# Altium PCB верхняя плата версия 2.PcbDoc (part 1 of 2)
Units mm, origin at the board's own origin, x right, y up, seen from the top; angles counter-clockwise.
Board outline 45 x 53 mm, 4 copper layers (Top Layer 1, Top Layer, Bottom Layer, Bottom Layer 1), stack 0.603 mm thick; 105 components, 130 nets, 774 pads, 328 vias.
Unrouted connection lines stored in the file: 15.
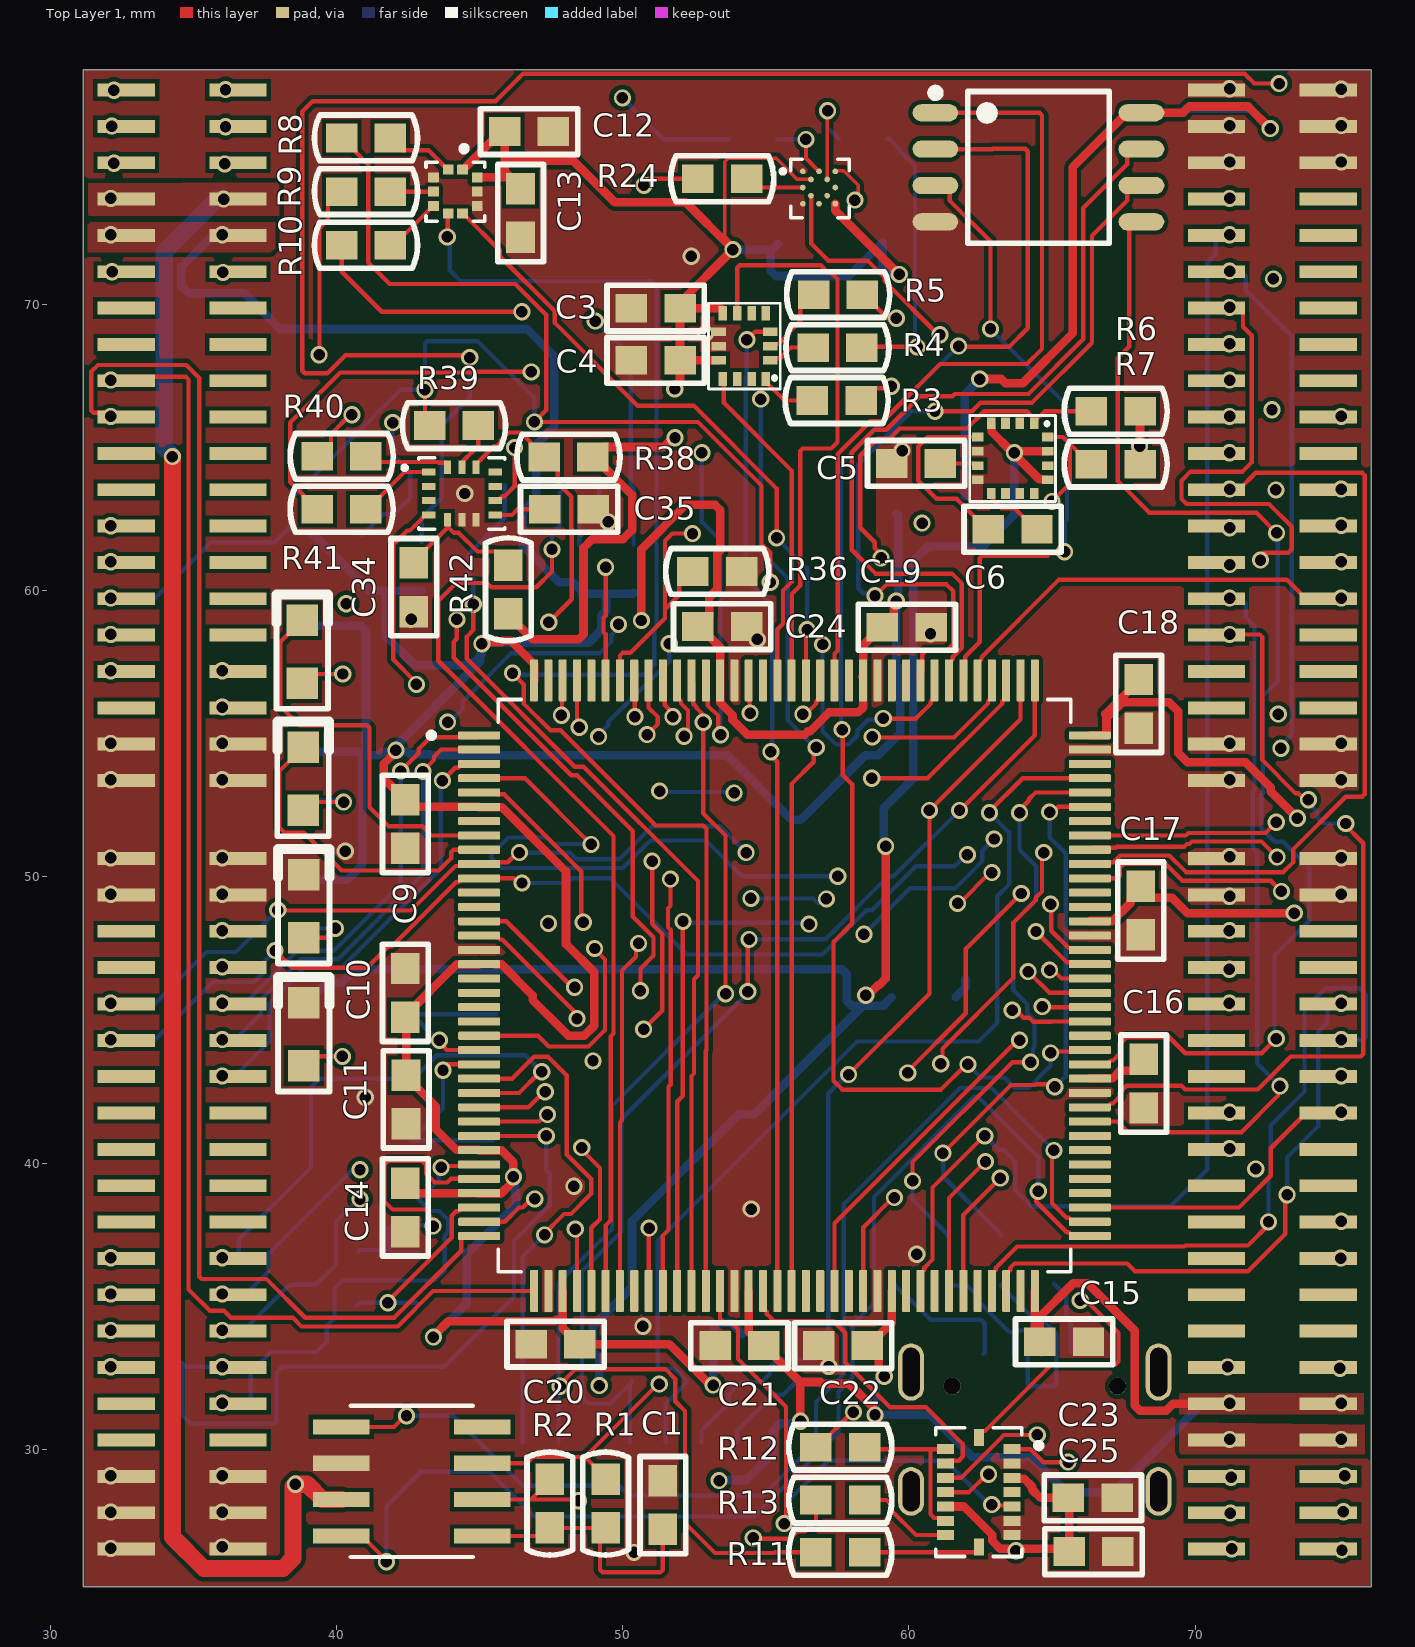
[diagram p0: Top Layer 1 view]
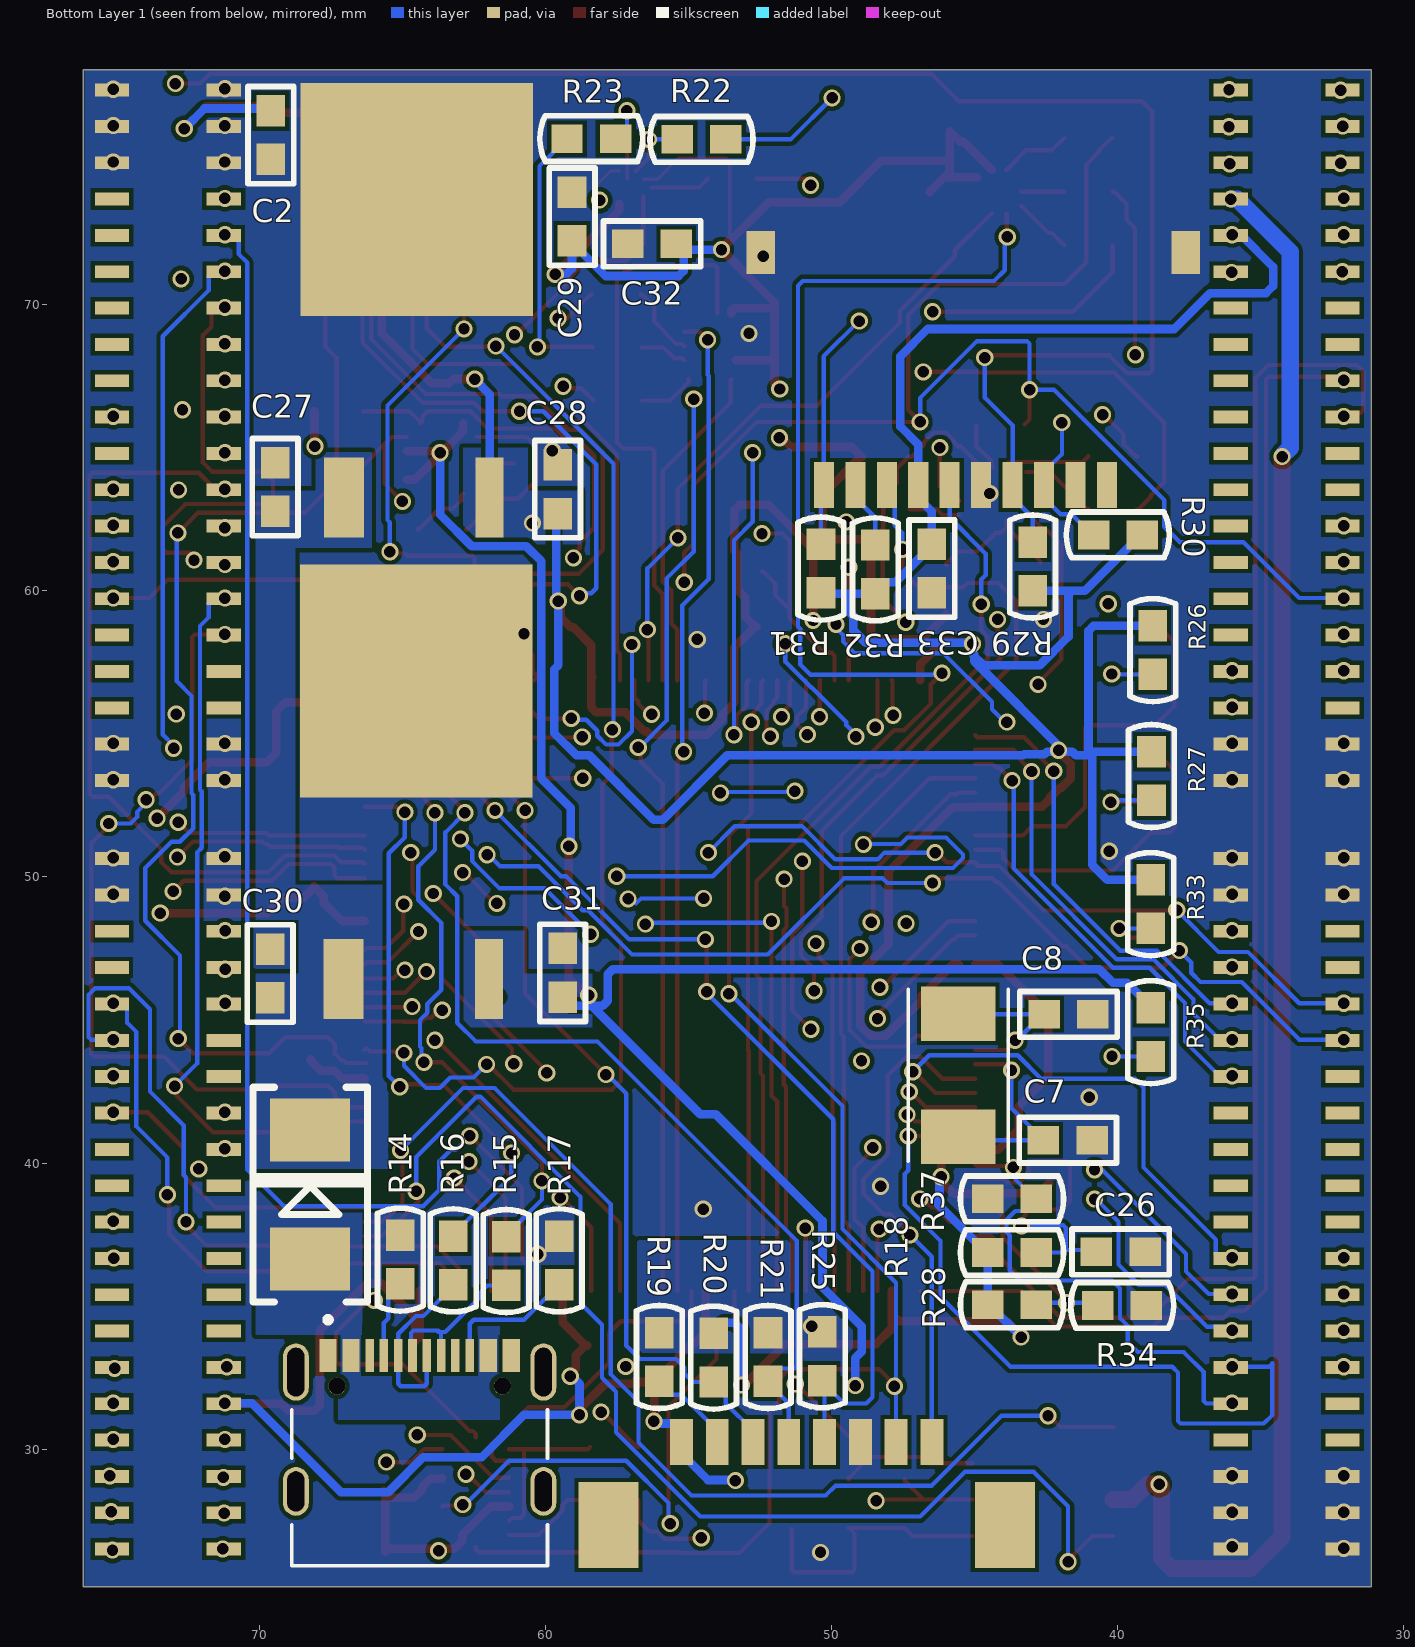
[diagram p1: Bottom Layer 1 view, seen from below]
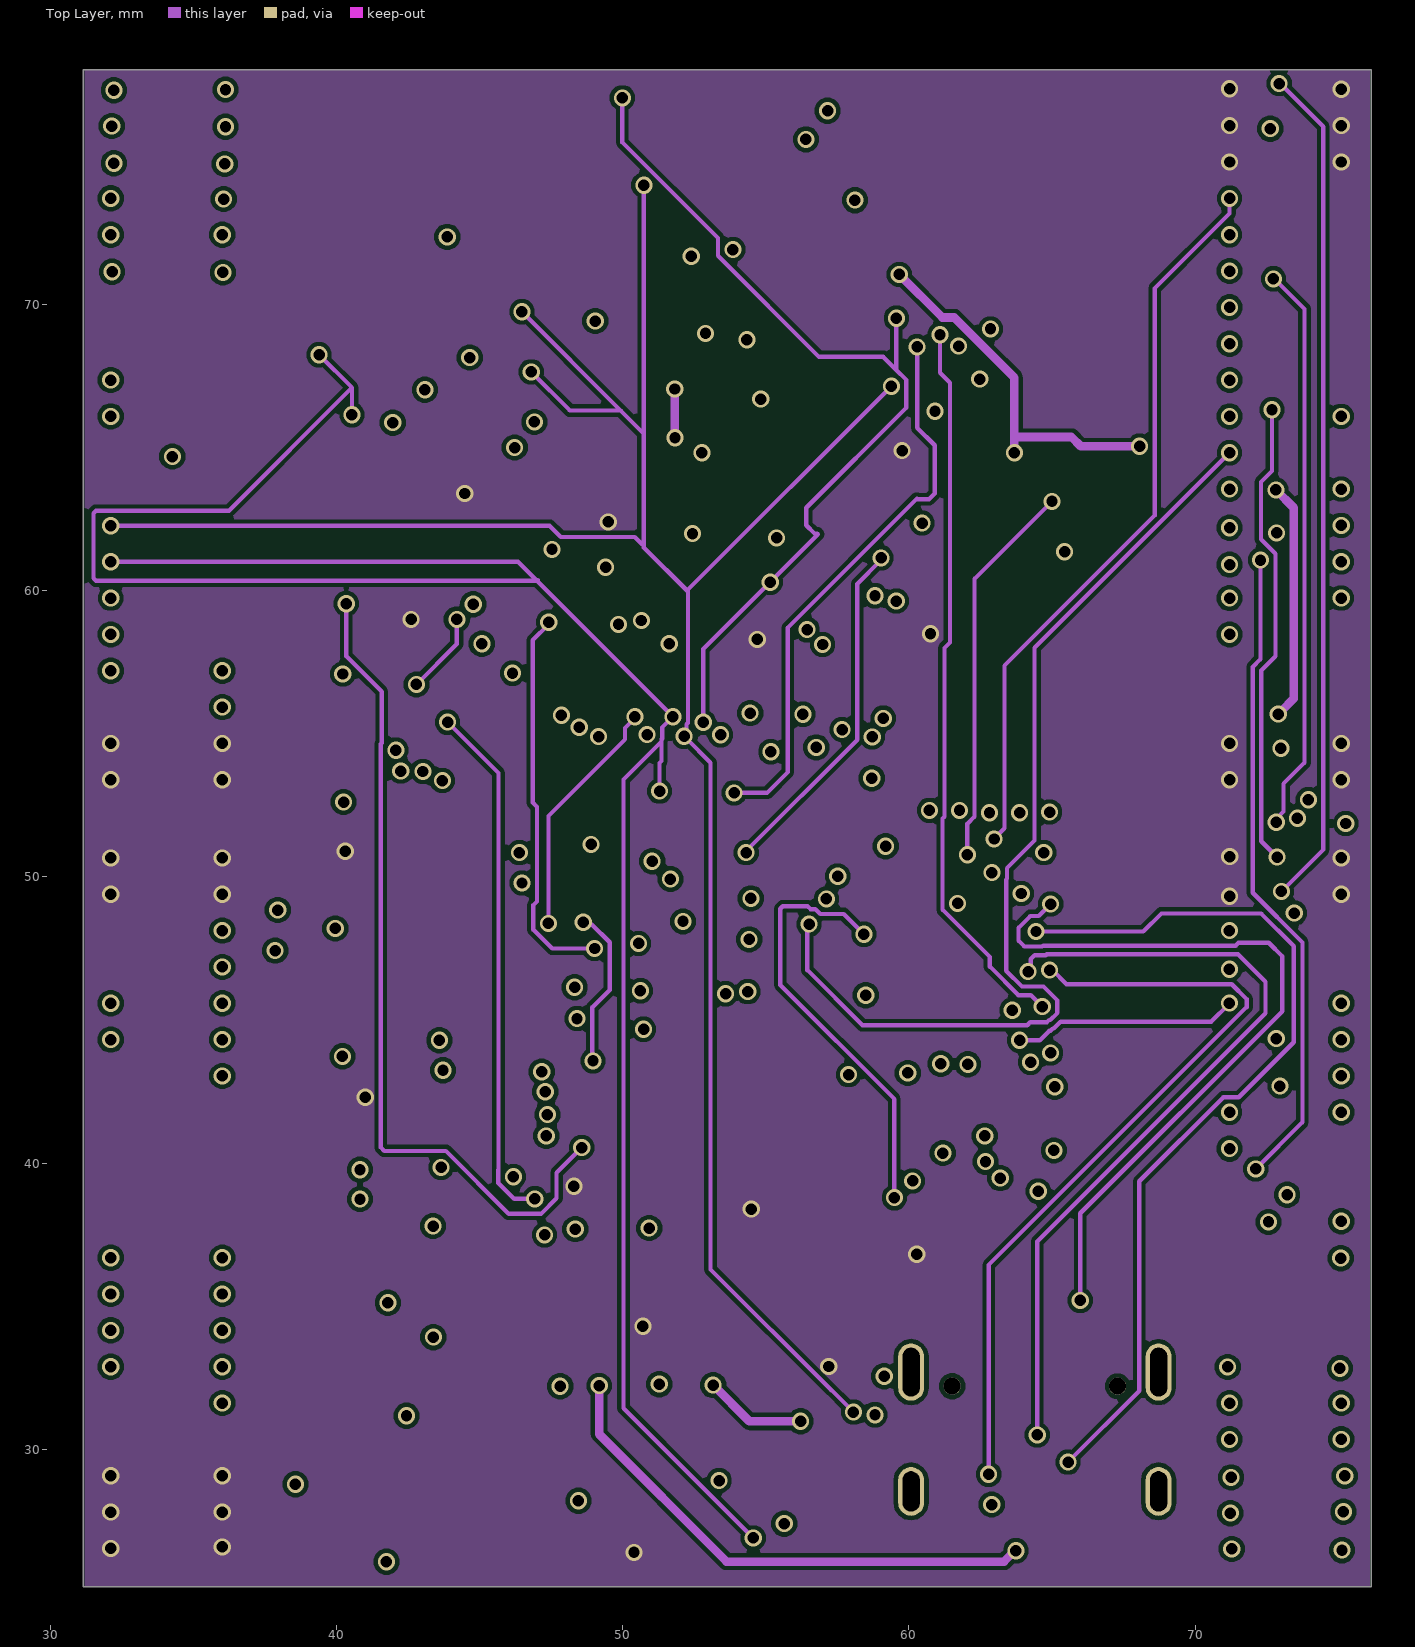
[diagram p2: Top Layer]
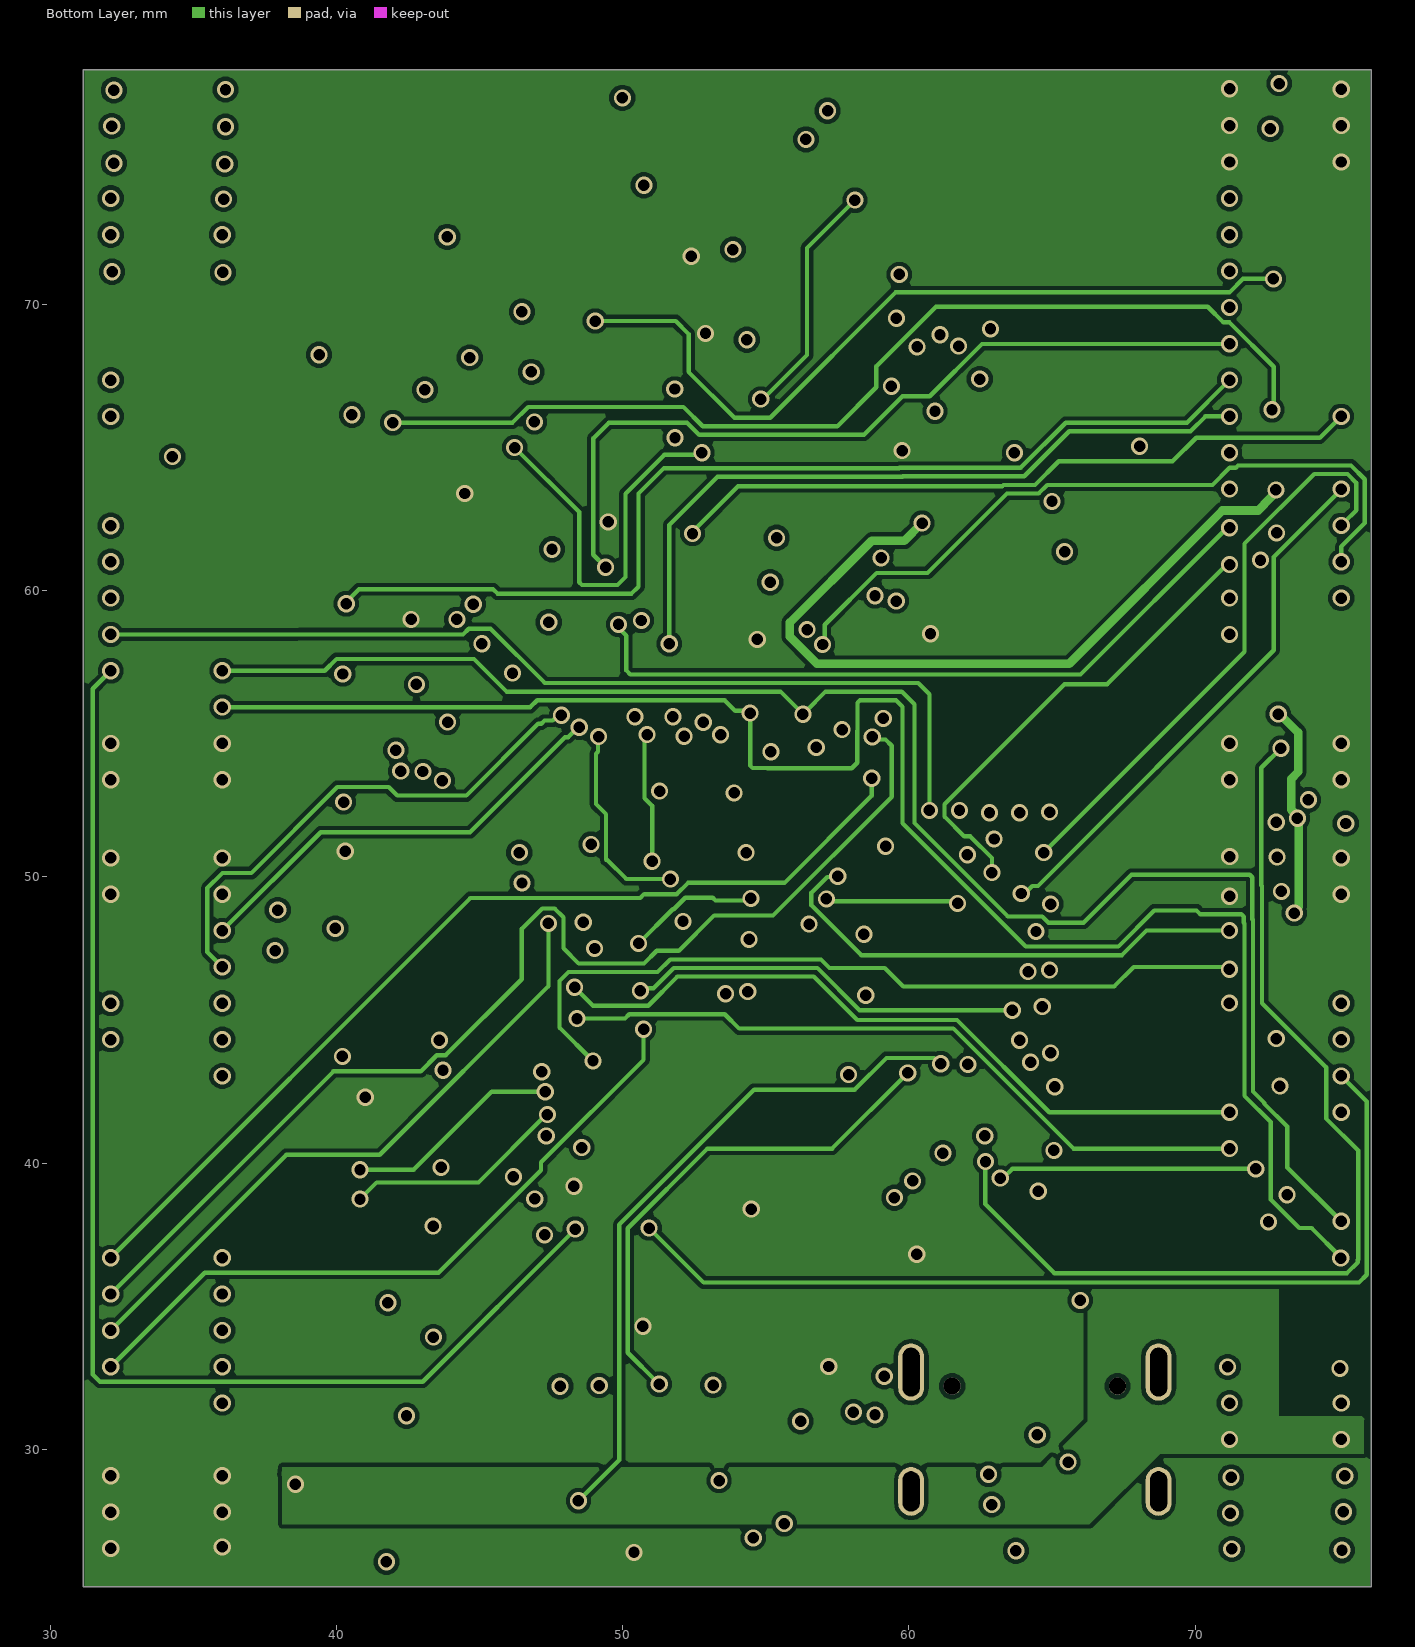
[diagram p3: Bottom Layer]
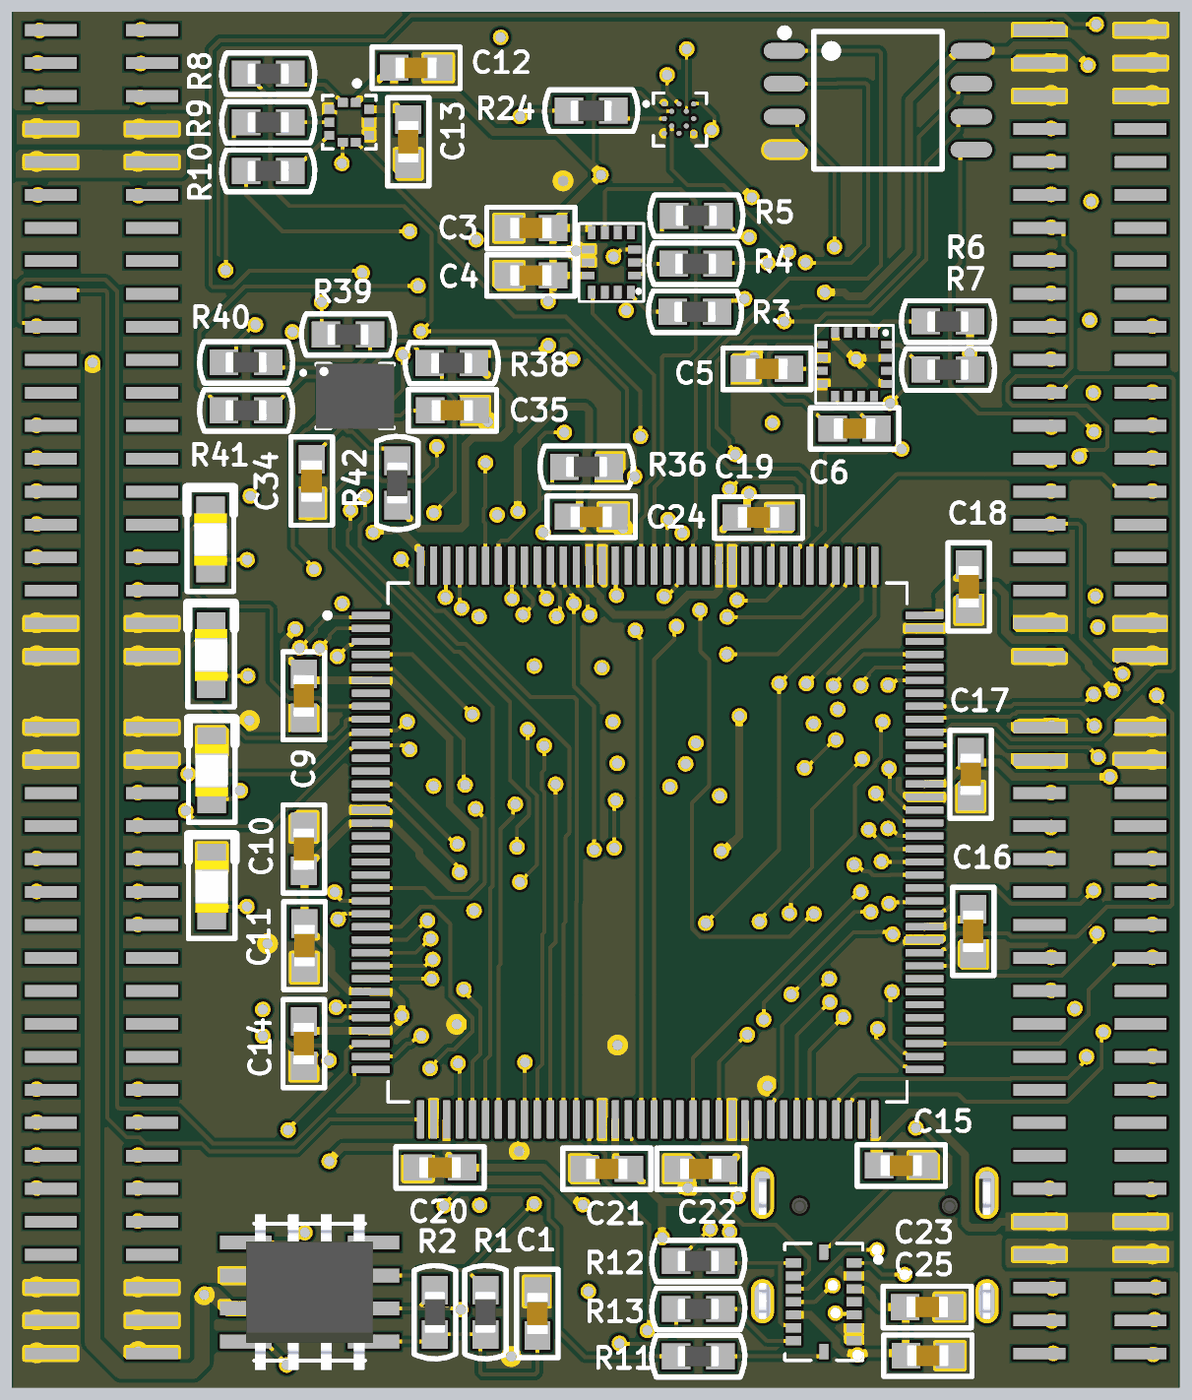
[diagram p5: 3D render of the assembled board from above, using the file's embedded part models]
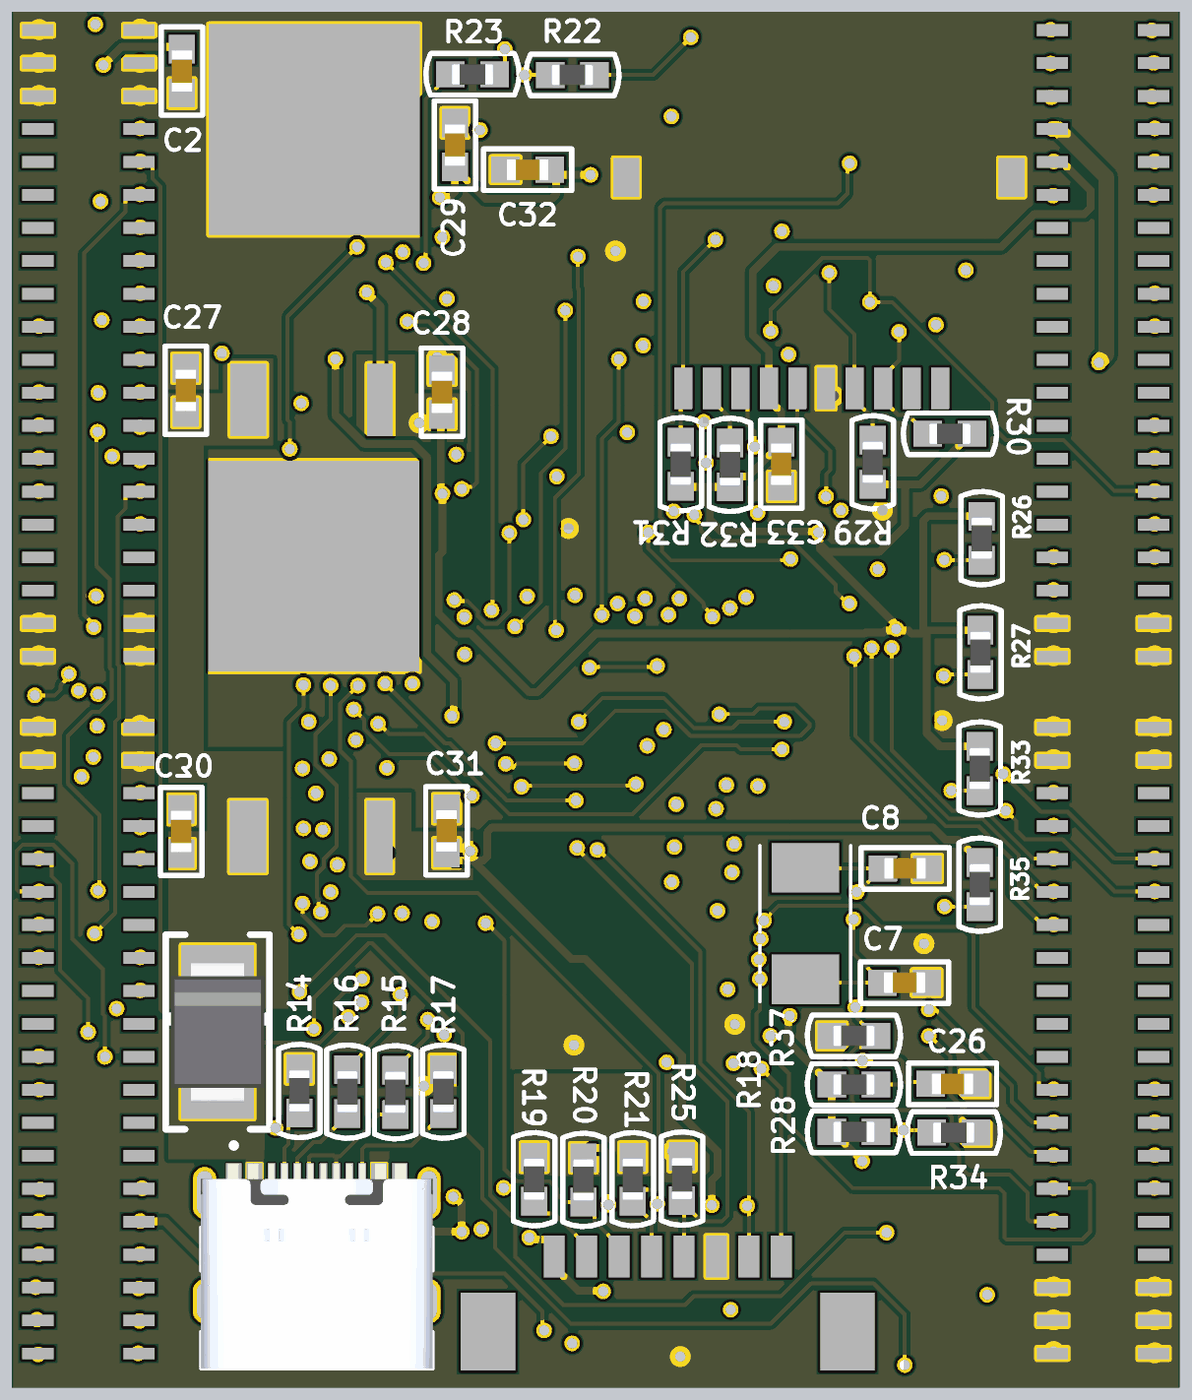
[diagram p6: 3D render of the assembled board from below, using the file's embedded part models]

## Layer stack, top to bottom
Top Solder: solder mask 0.0102, Solder Resist, Dk 3.5
Top Layer 1: signal copper 0.035
Dielectric 2: prepreg 0.0711, PP-006, Dk 4.1
Top Layer: signal copper 0.0356
Dielectric 1: dielectric 0.32, FR-4, Dk 4.8
Bottom Layer: signal copper 0.0356
Dielectric 3: prepreg 0.0711, PP-006, Dk 4.1
Bottom Layer 1: signal copper 0.035
Bottom Solder: solder mask 0.0102, Solder Resist, Dk 3.5

## Board outline
31.15,25.2 76.15,25.2 76.15,78.2 31.15,78.2

## Design rules (kind name [scope] priority, off if disabled: settings)
Clearance [All] p1: gap=0.15 ignorepadtopadclearanceinfootprint=FALSE except(0: Arc-Hole Track-Hole SMDPad-Hole THPad-Hole Via-Hole Fill-Hole Poly-Hole Region-Hole Text-Hole; 0.2: Arc-Region Track-Region SMDPad-Region THPad-Region Via-Region Fill-Region Poly-Region Region-Region)
PolygonConnect [All] p1: connectstyle=Direct reliefconductorwidth=0.254 reliefentries=4 polygonreliefangle="90 Angle" airgapwidth=0.254
RoutingVias [All] p1: holewidth=0.4 width=0.6 viastyle="Through Hole" minholewidth=0.4 minwidth=0.6 maxholewidth=0.4 maxwidth=0.6
SolderMaskExpansion [All] p1: expansion=0.102 istentingtop=FALSE
Width Width_5 [InNet('GND')] p1: maxlimit=0.6 minlimit=0.6 preferedwidth=0.6 minimp=50.000000 maximp=50.000000 favimp=50.000000
Width Width_4 [InNet('VCC')] p2: maxlimit=0.6 minlimit=0.6 preferedwidth=0.6 minimp=50.000000 maximp=50.000000 favimp=50.000000
Width Width_3 [InNet('5V')] p3: maxlimit=0.6 minlimit=0.5 preferedwidth=0.6 minimp=50.000000 maximp=50.000000 favimp=50.000000
Width Width_2 [InNet('3V3_SEN')] p4: maxlimit=0.3 minlimit=0.125 preferedwidth=0.3 minimp=50.000000 maximp=50.000000 favimp=50.000000
Width Width_1 [InNet('3V3')] p5: maxlimit=0.3 minlimit=0.3 preferedwidth=0.3 minimp=50.000000 maximp=50.000000 favimp=50.000000
Width [All] p6: maxlimit=0.15 minlimit=0.125 preferedwidth=0.15 minimp=50.000000 maximp=50.000000 favimp=50.000000
30 further rules are at their usual default settings.

## Classes and differential pairs
component class "верхняя плата версия 1": C1 C2 C3 C4 C5 C6 C7 C8 C9 C10 C11 C12 C13 C14 C15 C16 C17 C18 C19 C20 C21 C22 C23 C24 C25 C26 C27 C28 C29 C30 C31 C32 C33 C34 C35 R1 R2 R3 R4 R5 R6 R7 R8 R9 R10 R11 R12 R13 R14 R15 R16 R17 R18 R19 R20 R21 R22 R23 R24 R25 R26 R27 R28 R29 R30 R31 R32 R33 R34 R35 R36 R37 R38 R39 R40 R41 R42

## Components (designator, comment, footprint, x,y, rotation, side; value= is the part's Value field where it differs from the comment)
C1 "47 nF" C0603 51.4,28.05 r270 top
C2 "100 nF" C0603 69.6,75.925 r90 bottom
C3 "100 nF" C0603 51.15,69.875 r0 top
C4 "100 nF" C0603 51.15,68.05 r0 top
C5 "4.7 uF" C0603 60.25,64.45 r0 top
C6 "0.22 uF" C0603 63.625,62.15 r0 top
C7 "22 pF" C0603 41.75,40.8 r0 bottom
C8 "22 pF" C0603 41.725,45.2 r0 bottom
C9 "100 nF" C0603 42.4,51.85 r90 top
C10 "100 nF" C0603 42.4,45.95 r270 top
C11 "100 nF" C0603 42.425,42.225 r90 top
C12 "100 nF" C0603 46.725,76.05 r180 top
C13 "100 nF" C0603 46.425,73.2 r90 top
C14 "100 nF" C0603 42.4,38.45 r90 top
C15 "100 nF" C0603 65.425,33.75 r180 top
C16 "100 nF" C0603 68.2,42.775 r90 top
C17 "100 nF" C0603 68.1,48.825 r90 top
C18 "100 nF" C0603 68.025,56.05 r90 top
C19 "100 nF" C0603 59.925,58.725 r180 top
C20 "100 nF" C0603 47.65,33.675 r0 top
C21 "100 nF" C0603 54.075,33.625 r0 top
C22 "100 nF" C0603 57.7,33.625 r0 top
C23 "100 nF" C0603 66.425,28.3 r180 top
C24 "100 nF" C0603 53.475,58.75 r180 top
C25 "100 nF" C0603 66.45,26.425 r180 top
C26 "100 nF" C0603 39.9,36.9 r0 bottom
C27 "0.1 uF" C0603 69.45,63.625 r270 bottom
C28 "10 uF" C0603 59.575,63.55 r270 bottom
C29 "100 nF" C0603 59.075,73.075 r270 bottom
C30 "0.1 uF" C0603 69.625,46.625 r270 bottom
C31 "10 uF" C0603 59.4,46.65 r270 bottom
C32 "100 nF" C0603 56.275,72.125 r180 bottom
C33 "0.1 uF" C0603 46.5,60.775 r90 bottom
C34 "100 nF" C0603 42.7,60.125 r90 top
C35 "100 nF" C0603 48.125,62.85 r180 top
CAN1 "TJA1040T" SO-8_S 42.625,28.875 r0 top
D "D" GTFP08131Y2HR 45.425,71.025 r180 bottom
D1 "BMP388" PQFN50P200X200X80-10N 44.15,73.95 r270 top
D2 "BMI088" PQFN50P450X300X100-16N 62.44,28.5 r270 top
D3 "BMM150" XDCR_BMM150 56.893,74.057 r0 top
D4 "BMI270" XDCR_BMI270 44.375,63.4 r0 top
HL1 "" LD0805 38.8,57.875 r90 top
HL2 "" LD0805 38.825,53.425 r90 top
HL3 "" LD0805 38.85,48.975 r90 top
HL4 "" LD0805 38.85,44.5 r90 top
LDO1 "КФ1158Н" ТО-263 67.167,64.277 r180 bottom
LDO2 "КФ1158Н" ТО-263 67.184,47.45 r180 bottom
P "Header 1x8" "PicoBlade 8pin" 50.885,30.25 r180 bottom
R1 "60Om" R0603 49.4,28.1 r270 top
R2 "60 Om" R0603 47.45,28.1 r270 top
R3 "0" R0603 57.475,66.65 r0 top
R4 "0" R0603 57.5,68.5 r0 top
R5 "0" R0603 57.525,70.35 r0 top
R6 "2.2k" R0603 67.225,66.275 r0 top
R7 "2.2k" R0603 67.225,64.425 r0 top
R8 "0" R0603 41.025,75.825 r0 top
R9 "0" R0603 41.025,73.95 r0 top
R10 "0" R0603 41.025,72.075 r0 top
R11 "0" R0603 57.6,26.4 r0 top
R12 "0" R0603 57.6,30.075 r180 top
R13 "0" R0603 57.6,28.225 r0 top
R14 "5,1 кОм" R0603 65.075,36.625 r270 bottom
R15 "68" R0603 61.375,36.575 r90 bottom
R16 "68" R0603 63.225,36.6 r90 bottom
R17 "5,1 кОм" R0603 59.525,36.6 r90 bottom
R18 "47 Ом" R0603 43.7,36.875 r180 bottom
R19 "47 кОм" R0603 56.025,33.225 r90 bottom
R20 "47 кОм" R0603 54.125,33.2 r90 bottom
R21 "47 кОм" R0603 52.225,33.225 r90 bottom
R22 "0" R0603 54.55,75.775 r0 bottom
R23 "0" R0603 58.4,75.8 r180 bottom
R24 "0" R0603 53.475,74.4 r180 top
R25 "47 кОм" R0603 50.325,33.25 r90 bottom
R26 "220" R0603 38.775,57.925 r90 bottom
R27 "220" R0603 38.825,53.525 r90 bottom
R28 "0" R0603 43.7,35.05 r0 bottom
R29 "47 кОм" R0603 42.975,60.85 r90 bottom
R30 "47 кОм" R0603 40,61.95 r0 bottom
R31 "47 кОм" R0603 50.375,60.775 r90 bottom
R32 "47 кОм" R0603 48.475,60.75 r90 bottom
R33 "220" R0603 38.85,49.05 r90 bottom
R34 "0" R0603 39.85,35.025 r0 bottom
R35 "220" R0603 38.85,44.575 r90 bottom
R36 "10 kOm" R0603 53.3,60.675 r0 top
R37 "0" R0603 43.7,38.75 r0 bottom
R38 "10 кОм" R0603 48.1,64.675 r0 top
R39 "0" R0603 44.1,65.775 r0 top
R40 "0" R0603 40.175,64.7 r0 top
R41 "0" R0603 40.175,62.85 r0 top
R42 "0" R0603 46,60.05 r270 top
TYPE-C1 "TYPE-C-31-M-12" HRO_TYPE-C-31-M-12 64.4,28.525 r180 bottom
U1 "W25Q128FVSIG" SOIC127P790X216-8N 64.525,74.8 r0 top
U2 "QMI8658" QMI8658 54.2,68.475 r270 top
U3 "QMC5883L" QMC5883L 63.625,64.7 r0 top
U4 "K1921BK01T2" QFP50P2200X2200X160-144N 55.65,46.2 r0 top
VD1 "" DO-214AA 68.225,38.9 r90 bottom
XP1_1 "PLLD-1.27-40S" "Headr 2x20 male" 34.597,65.649 r0 top locked
XP1_2 "PLLD-1.27-40S" "Headr 2x20 Female" 33.97,66.538 r0 bottom locked
XP2_1 "PLLD-1.27-40S" "Headr 2x20 male" 72.697,65.649 r0 top locked
XP2_2 "PLLD-1.27-40S" "Headr 2x20 Female" 73.07,66.538 r0 bottom locked
XP3_1 "PLLD-1.27-40S" "Headr 2x20 male" 34.597,38.789 r0 top locked
XP3_2 "PLLD-1.27-40S" "Headr 2x20 Female" 33.97,39.678 r0 bottom locked
XP4_1 "PLLD-1.27-40S" "Headr 2x20 male" 72.697,38.789 r0 top locked
XP4_2 "PLLD-1.27-40S" "Headr 2x20 Female" 73.07,39.678 r0 bottom locked
Y1 "8 мгц" XTAL_ABM7-8.000MHZ-8-R80-D2Y-T 45.575,43.075 r270 bottom

## Footprints (in the part's own frame and the unit in brackets; to place one, negate y for a bottom-side part, rotate by r counter-clockwise, add the part's x,y. Pads: shape width x height; smd on the part's side, far side on the other; paste and mask are expansions set on the pad)
C0603 [mm] "1608M"
  rect 1.1x1 smd: 1(-0.85,0) 2(0.85,0)
  silkscreen extent -1.7,-0.8 1.7,0.8, body extent -0.8,-0.4 0.8,0.4, height 0.91
DO-214AA [mm] "(SMB) Low profile package"
  rect 2.2x2.8 smd: 1(-2.25,0) 2(2.25,0)
  silkscreen extent -3.75,-2 3.75,2, body extent -2.7,-1.8 2.7,1.8, height 2.3
GTFP08131Y2HR [mm]
  rect 0.7x1.6 smd: 1(-4.85,-7.325) 2(-3.75,-7.325) 3(-2.65,-7.325) 4(-1.55,-7.325) 5(-0.45,-7.325) 6(0.65,-7.325) 7(1.75,-7.325) 8(2.85,-7.325) 9(3.95,-7.325) CD(5.05,-7.325)
  rect 1x1.5 smd: S1(-7.05,0.8) S2(7.8,0.8)
"Headr 2x20 Female" [mm]
  rect 1.2x0.45 smd: 1(-1.82,-10.962) 2(2.08,-10.962) 3(-1.82,-9.692) 4(2.08,-9.692) 5(-1.82,-8.422) 6(2.08,-8.422) 7(-1.82,-7.152) 8(2.08,-7.152) 9(-1.82,-5.882) 10(2.08,-5.882) 11(-1.82,-4.612) 12(2.08,-4.612) 13(-1.82,-3.342) 14(2.08,-3.342) 15(-1.82,-2.072) 16(2.08,-2.072) 17(-1.82,-0.802) 18(2.08,-0.802) 19(-1.82,0.468) 20(2.08,0.468) 21(-1.82,1.738) 22(2.08,1.738) 23(-1.82,3.008) 24(2.08,3.008) 25(-1.82,4.278) 26(2.08,4.278) 27(-1.82,5.548) 28(2.08,5.548) 29(-1.82,6.818) 30(2.08,6.818) 31(-1.82,8.088) 32(2.08,8.088) 33(-1.82,9.358) 34(2.08,9.358) 35(-1.82,10.628) 36(2.08,10.628) 37(-1.82,11.898) 38(2.08,11.898) 39(-1.82,13.168) 40(2.08,13.168)
"Headr 2x20 male" [mm]
  rect 2x0.45 smd: 1(-1.947,11.851) 2(1.953,11.851) 3(-1.947,10.581) 4(1.953,10.581) 5(-1.947,9.311) 6(1.953,9.311) 7(-1.947,8.041) 8(1.953,8.041) 9(-1.947,6.771) 10(1.953,6.771) 11(-1.947,5.501) 12(1.953,5.501) 13(-1.947,4.231) 14(1.953,4.231) 15(-1.947,2.961) 16(1.953,2.961) 17(-1.947,1.691) 18(1.953,1.691) 19(-1.947,0.421) 20(1.953,0.421) 21(-1.947,-0.849) 22(1.953,-0.849) 23(-1.947,-2.119) 24(1.953,-2.119) 25(-1.947,-3.389) 26(1.953,-3.389) 27(-1.947,-4.659) 28(1.953,-4.659) 29(-1.947,-5.929) 30(1.953,-5.929) 31(-1.947,-7.199) 32(1.953,-7.199) 33(-1.947,-8.469) 34(1.953,-8.469) 35(-1.947,-9.739) 36(1.953,-9.739) 37(-1.947,-11.009) 38(1.953,-11.009) 39(-1.947,-12.279) 40(1.953,-12.279)
HRO_TYPE-C-31-M-12 [mm]
  rect 0.6x1.14 smd mask+0.05: 2(2.4,4.75) 15(-2.4,4.75) A1_B12(-3.2,4.75) B1_A12(3.2,4.75)
  rect 0.3x1.14 smd mask+0.05: A5(-1.25,4.75) A6(-0.25,4.75) A7(0.25,4.75) A8(1.25,4.75) B5(1.75,4.75) B6(0.75,4.75) B7(-0.75,4.75) B8(-1.75,4.75)
  oval 0.9x2 hole 0.6 slot 1.7 at 90 deg: S1(-4.325,4.17) S2(4.325,4.17)
  oval 0.9x1.7 hole 0.6 slot 1.4 at 90 deg: S3(-4.325,0) S4(4.325,0)
  round 0.6 hole 0.6 unplated: ""(-2.89,3.68) ""(2.89,3.68)
  silkscreen extent -4.47,-2.6 4.47,6.1, body extent -4.47,-2.6 4.47,5.31, height 3.31
LD0805 [mm]
  rect 1.1x1.1 smd: 1(-1.1,0) 2(1.1,0)
  silkscreen extent -2,-0.9 2,0.9, body extent -1,-0.62 1,0.63, height 0.73
"PicoBlade 8pin" [mm]
  rect 0.8x1.6 smd: 1(-4.365,0) 2(-3.115,0) 3(-1.865,0) 4(-0.615,0) 5(0.635,0) 6(1.885,0) 7(3.135,0) 8(4.385,0)
  rect 2.1x3 smd: S(-6.915,-2.9) S(6.935,-2.9)
PQFN50P200X200X80-10N [mm]
  rrect9% 0.35x0.38 smd: 1(-0.765,0.25) 2(-0.765,-0.25) 3(-0.5,-0.765) 4(0,-0.765) 5(0.5,-0.765) 6(0.765,-0.25) 7(0.765,0.25) 8(0.5,0.765) 9(0,0.765) 10(-0.5,0.765)
  silkscreen extent -1.6,-1.03 1.03,1.03
PQFN50P450X300X100-16N [mm]
  rect 0.35x0.59 smd: 1(-1.5,1.165) 2(-1,1.165) 3(-0.5,1.165) 4(0,1.165) 5(0.5,1.165) 6(1,1.165) 7(1.5,1.165) 9(1.5,-1.165) 10(1,-1.165) 11(0.5,-1.165) 12(0,-1.165) 13(-0.5,-1.165) 14(-1,-1.165) 15(-1.5,-1.165)
  rect 0.59x0.35 smd: 8(1.915,0) 16(-1.915,0)
  silkscreen extent -2.25,-1.5 2.25,2.2
QFP50P2200X2200X160-144N [mm]
  rrect25% 1.47x0.28 smd: 1(-10.67,8.75) 2(-10.67,8.25) 3(-10.67,7.75) 4(-10.67,7.25) 5(-10.67,6.75) 6(-10.67,6.25) 7(-10.67,5.75) 8(-10.67,5.25) 9(-10.67,4.75) 10(-10.67,4.25) 11(-10.67,3.75) 12(-10.67,3.25) 13(-10.67,2.75) 14(-10.67,2.25) 15(-10.67,1.75) 16(-10.67,1.25) 17(-10.67,0.75) 18(-10.67,0.25) 19(-10.67,-0.25) 20(-10.67,-0.75) 21(-10.67,-1.25) 22(-10.67,-1.75) 23(-10.67,-2.25) 24(-10.67,-2.75) 25(-10.67,-3.25) 26(-10.67,-3.75) 27(-10.67,-4.25) 28(-10.67,-4.75) 29(-10.67,-5.25) 30(-10.67,-5.75) 31(-10.67,-6.25) 32(-10.67,-6.75) 33(-10.67,-7.25) 34(-10.67,-7.75) 35(-10.67,-8.25) 36(-10.67,-8.75) 73(10.67,-8.75) 74(10.67,-8.25) 75(10.67,-7.75) 76(10.67,-7.25) 77(10.67,-6.75) 78(10.67,-6.25) 79(10.67,-5.75) 80(10.67,-5.25) 81(10.67,-4.75) 82(10.67,-4.25) 83(10.67,-3.75) 84(10.67,-3.25) 85(10.67,-2.75) 86(10.67,-2.25) 87(10.67,-1.75) 88(10.67,-1.25) 89(10.67,-0.75) 90(10.67,-0.25) 91(10.67,0.25) 92(10.67,0.75) 93(10.67,1.25) 94(10.67,1.75) 95(10.67,2.25) 96(10.67,2.75) 97(10.67,3.25) 98(10.67,3.75) 99(10.67,4.25) 100(10.67,4.75) 101(10.67,5.25) 102(10.67,5.75) 103(10.67,6.25) 104(10.67,6.75) 105(10.67,7.25) 106(10.67,7.75) 107(10.67,8.25) 108(10.67,8.75)
  rrect25% 0.28x1.47 smd: 37(-8.75,-10.67) 38(-8.25,-10.67) 39(-7.75,-10.67) 40(-7.25,-10.67) 41(-6.75,-10.67) 42(-6.25,-10.67) 43(-5.75,-10.67) 44(-5.25,-10.67) 45(-4.75,-10.67) 46(-4.25,-10.67) 47(-3.75,-10.67) 48(-3.25,-10.67) 49(-2.75,-10.67) 50(-2.25,-10.67) 51(-1.75,-10.67) 52(-1.25,-10.67) 53(-0.75,-10.67) 54(-0.25,-10.67) 55(0.25,-10.67) 56(0.75,-10.67) 57(1.25,-10.67) 58(1.75,-10.67) 59(2.25,-10.67) 60(2.75,-10.67) 61(3.25,-10.67) 62(3.75,-10.67) 63(4.25,-10.67) 64(4.75,-10.67) 65(5.25,-10.67) 66(5.75,-10.67) 67(6.25,-10.67) 68(6.75,-10.67) 69(7.25,-10.67) 70(7.75,-10.67) 71(8.25,-10.67) 72(8.75,-10.67) 109(8.75,10.67) 110(8.25,10.67) 111(7.75,10.67) 112(7.25,10.67) 113(6.75,10.67) 114(6.25,10.67) 115(5.75,10.67) 116(5.25,10.67) 117(4.75,10.67) 118(4.25,10.67) 119(3.75,10.67) 120(3.25,10.67) 121(2.75,10.67) 122(2.25,10.67) 123(1.75,10.67) 124(1.25,10.67) 125(0.75,10.67) 126(0.25,10.67) 127(-0.25,10.67) 128(-0.75,10.67) 129(-1.25,10.67) 130(-1.75,10.67) 131(-2.25,10.67) 132(-2.75,10.67) 133(-3.25,10.67) 134(-3.75,10.67) 135(-4.25,10.67) 136(-4.75,10.67) 137(-5.25,10.67) 138(-5.75,10.67) 139(-6.25,10.67) 140(-6.75,10.67) 141(-7.25,10.67) 142(-7.75,10.67) 143(-8.25,10.67) 144(-8.75,10.67)
  silkscreen extent -12.44,-10 10,10
QMC5883L [mm]
  rect 0.4x0.3 smd: 1(1.225,0.675) 2(1.225,0.175) 3(1.225,-0.325) 4(1.225,-0.825) 9(-1.225,-0.825) 10(-1.225,-0.325) 11(-1.225,0.175) 12(-1.225,0.675)
  rect 0.3x0.4 smd: 5(0.75,-1.3) 6(0.25,-1.3) 7(-0.25,-1.3) 8(-0.75,-1.3) 13(-0.75,1.15) 14(-0.25,1.15) 15(0.25,1.15) 16(0.75,1.15)
  silkscreen extent -1.5,-1.58 1.5,1.42
QMI8658 [mm]
  rect 0.5x0.3 smd: 1(1.075,0.8) 2(1.075,0.3) 3(1.075,-0.2) 4(1.075,-0.7) 8(-1.225,-0.7) 9(-1.225,-0.2) 10(-1.225,0.3) 11(-1.225,0.8)
  rect 0.3x0.5 smd: 5(0.425,-0.85) 6(-0.075,-0.85) 7(-0.575,-0.85) 12(-0.575,0.95) 13(-0.075,0.95) 14(0.425,0.95)
  silkscreen extent -1.57,-1.2 1.43,1.3
R0603 [mm] "1608M"
  rect 1.1x1 smd: 1(-0.85,0) 2(0.85,0)
  silkscreen extent -1.8,-0.8 1.8,0.8, body extent -0.8,-0.4 0.8,0.4, height 0.38
SO-8_S [mil]
  rect 78x21 smd: 1(-97,75) 2(-97,25) 3(-97,-25) 4(-97,-75) 5(97,-75) 6(97,-25) 7(97,25) 8(97,75)
  silkscreen extent -84,-104 84,104, body extent -96,-118 96,118, height 69
SOIC127P790X216-8N [mm]
  oval 1.6x0.6 smd: 1(-3.6,1.905) 2(-3.6,0.635) 3(-3.6,-0.635) 4(-3.6,-1.905) 5(3.6,-1.905) 6(3.6,-0.635) 7(3.6,0.635) 8(3.6,1.905)
  silkscreen extent -3.82,-2.65 2.47,2.82
XDCR_BMI270 [mm]
  rect 0.475x0.25 smd: 1(-1.162,0.75) 2(-1.162,0.25) 3(-1.162,-0.25) 4(-1.162,-0.75) 8(1.162,-0.75) 9(1.162,-0.25) 10(1.162,0.25) 11(1.162,0.75)
  rect 0.25x0.475 smd: 5(-0.5,-0.913) 6(0,-0.913) 7(0.5,-0.913) 12(0.5,0.913) 13(0,0.913) 14(-0.5,0.913)
  silkscreen extent -2.07,-1.25 1.5,1.25, body extent -1.5,-1.25 1.5,1.25, height 0.87
XDCR_BMM150 [mm]
  round 0.2 smd: A1(-0.601,0.601) A3(-0.035,0.601) A5(0.531,0.601) B2(-0.318,0.318) B4(0.248,0.318) C1(-0.601,0.035) C5(0.531,0.035) D2(-0.318,-0.248) D4(0.248,-0.248) E1(-0.601,-0.531) E3(-0.035,-0.531) E5(0.531,-0.531)
  silkscreen extent -1.37,-1.02 1.02,1.02
XTAL_ABM7-8.000MHZ-8-R80-D2Y-T [mm]
  rect 1.9x2.6 smd: 1(-2.15,0) 2(2.15,0)
  silkscreen extent -3,-1.75 3,1.75
ТО-263 [mm]
  rect 1.4x2.79 smd: 1(0.127,-1.022)
  rect 8.13x8.13 smd: 2(2.667,9.398)
  rect 0.99x2.79 smd: 3(5.207,-1.022)

## Part data
C1 C2 C3 C4 C5 C6 C7 C8 C9 C10 C11 C12 C13 C14 C15 C16 C17 C18 C19 C20 C21 C22 C23 C24 C25 C26 C27 C28 C29 C30 C31 C32 C33 C34 C35: library part Capacitor, Published=18.05.2010, Publisher="Andrew Danich", Type=Конденсатор
D: library part GTFP08131Y2HR
HL1 HL2 HL3 HL4: library part Led-1, Published=03.12.2013, Publisher="Andrew Danich", Type="Индикатор единичный"
R1 R2 R3 R4 R5 R6 R7 R8 R9 R10 R11 R12 R13 R14 R15 R16 R17 R18 R19 R20 R21 R22 R23 R24 R25 R26 R27 R28 R29 R30 R31 R32 R33 R34 R35 R36 R37 R38 R39 R40 R41 R42: library part Resistor, Published=24.03.2010, Publisher="Andrew Danich", Type=Резистор
VD1: library part Schottky
Y1: library part ABM7-8.000MHZ-8-R80-D2Y-T, "Crystal 22.1184MHz Ã‚Â±20ppm (Tol) Ã‚Â±30ppm (Stability) 18pF FUND 50Ohm 2-Pin Mini-CSMD T/R", Package=None, Availability=Unavailable, MP=ABM7-8.000MHZ-8-R80-D2Y-T, Price=None

## Via types
v1: diameter 0.6, hole 0.4, Top Layer 1 to Bottom Layer 1, 328 vias

## Nets (pads, with @x,y where several pads share a name; then routed paths per layer and width w, separated by ;. In a path a pad name is that pad's centre, name@x,y a point inside that pad or via, vN(x,y) a via of type N, cw(c..) or ccw(c..) an arc to the next point about the centre after c; other vN are vias at no path point)
3V3: C2.2 C9.2 C10.2 C11.2 C14.2 C15.2 C16.2 C17.2 C18.2 C19.2 C20.2 C21.2 C22.2 C24.2 C28.2 C33.2 D.4 LDO1.3 P.1 R18.1 R19.2 R20.2 R21.2 R26.2 R27.2 R28.2 R29.1 R30.1 R31.1 R32.1 R33.2 U1.8 U4.6 U4.17 U4.30 U4.33 U4.39 U4.52 U4.62 U4.72 U4.84 U4.95 U4.108 U4.121 U4.131 U4.144 XP1_1.9 XP1_1.10 XP1_2.9 XP1_2.10 XP4_1.31 XP4_1.32 XP4_2.31 XP4_2.32 | length 316.3
  Top Layer 1 w0.3: v1(42.069,54.43) 42.069,54.377 41.641,53.949 41.641,53.451 41.992,53.1 42.05,53.1 42.4,52.75 C9.2@42.4,52.7 42.65,52.45 U4.6@44.98,52.45 44.99,52.44 45.769,52.44 48.016,50.193 48.016,47.651 49,46.667 49,44.801 48.649,44.45 48.1,44.45 47.926,44.624 46.847,45.703 46.847,45.862 45.769,46.94 U4.17@45.565,46.94 ; C14.2@42.4,39.3 42.75,38.949 U4.33@44.925,38.949 ; C10.2@42.4,45.1 42.425,45.075 42.425,43.025 43.458,41.992 43.458,41.193 44.191,40.46 44.97,40.46 44.99,40.44 45.769,40.44 46.175,40.034 v1(46.175,39.525) 46.118,39.468 46.118,39.309 45.734,38.925 U4.33@44.925,38.925 ; C10.2@42.4,45.15 44.19,46.94 44.97,46.94 U4.17@44.98,46.95 ; v1@43.4,33.975 43.9,34.475 47.624,34.475 47.674,34.525 47.9,34.525 ; v1(45.075,58.15) 45.132,58.207 45.752,58.207 45.795,58.25 46.095,58.25 46.9,57.445 U4.144@46.9,56.87 ; U4.39@47.9,35.53 47.9,34.525 ; v1(50.65,58.962) 50.65,61.455 52.195,63 53.224,63 53.4,62.824 53.4,61.399 53.3,61.299 53.3,60.051 53.025,59.776 53.025,59.1 C24.2@52.675,58.75 ; C24.2@52.625,58.75 C24.2@52.675,58.75 ; v1@53.075,32.225 51.625,33.675 C20.2@48.5,33.675 48.45,33.675 47.9,34.225 47.9,34.525 ; U4.52@54.4,35.53 54.4,34.1 54.875,33.625 C21.2@54.925,33.625 54.975,33.625 55.325,33.275 55.325,33.225 56.2,32.35 ; v1@56.2,31.025 56.2,32.35 ; U4.121@58.375,57 58.4,56.975 58.4,55.926 58.224,55.75 57.206,55.75 56.541,55.085 56.47,55.085 56.36,54.975 54.351,54.975 53.834,55.492 53.834,55.657 53.41,56.081 53.41,56.86 U4.131@53.4,56.87 53.4,58.025 C24.2@52.675,58.75 ; U4.121@58.4,57 58.4,58.1 59.025,58.725 59.125,58.725 59.475,59.075 59.475,59.542 59.552,59.619 v1@59.552,59.7 ; C22.2@58.55,33.625 C22.2@58.6,33.625 ; v1@58.775,31.2 58.775,31.434 57.917,32.291 56.96,32.291 56.901,32.35 56.2,32.35 ; v1@59.075,32.675 59.08,32.68 59.08,32.69 58.95,32.821 58.95,33.275 C22.2@58.6,33.625 ; U4.62@59.4,35.53 59.4,34.425 C22.2@58.6,33.625 ; v1(62.475,67.4) 63.225,67.4 63.375,67.25 63.975,67.25 65.719,68.994 65.719,74.799 67.625,76.705 U1.8@68.125,76.705 69.576,76.705 69.795,76.925 71.85,76.925 v1(72.625,76.15) ; U4.72@64.4,35.53 64.4,33.925 C15.2@64.575,33.75 64.575,34.638 65.739,35.802 66.236,35.802 67.89,34.148 67.89,31.526 68.066,31.35 68.991,31.35 69.231,31.59 XP4_1.31@70.75,31.59 71.285,31.59 XP4_1.31@71.3,31.575 ; U4.84@66.32,42.95 66.33,42.96 67.109,42.96 67.374,43.225 67.85,43.225 68.2,43.575 C16.2@68.2,43.625 ; U4.95@66.32,48.45 66.33,48.46 67.109,48.46 67.75,49.101 67.75,49.325 C17.2@68.1,49.675 68.1,49.625 68.45,49.275 69.196,49.275 69.746,48.725 73.454,48.725 v1(73.465,48.735) ; U4.108@66.32,54.95 66.895,54.95 66.905,54.96 66.905,55.554 67.451,56.1 69.099,56.1 69.417,55.782 69.417,54.323 69.736,54.005 71.764,54.005 72.641,53.128 72.641,52.984 v1(73.575,52.05) ; 66.87,55.695 68.025,56.85 C18.2@68.025,56.9
  Top Layer w0.3: v1(53.158,32.241) 54.422,30.977 56.152,30.977 v1@56.175,31 ; v1(72.825,63.525) 73.45,62.9 73.45,56.234 73,55.784 v1@73,55.775
  Bottom Layer w0.3: v1(60.458,62.366) 59.841,61.75 58.7,61.75 55.841,58.891 55.841,58.394 56.785,57.45 65.602,57.45 70.956,62.805 72.205,62.805 72.417,63.017 72.417,63.036 72.825,63.444 v1(72.825,63.525) ; v1@72.9,55.75 73.6,55.05 73.6,53.67 73.358,53.427 73.358,52.348 73.575,52.131 v1(73.575,52.05) 73.616,52.009 73.616,48.967 73.45,48.802 v1@73.45,48.8
  Bottom Layer 1 w0.3: XP1_2.10@36.025,72.45 35.705,72.45 34.575,71.32 34.575,70.65 34.82,70.405 36.774,70.405 38.029,69.15 46.65,69.15 47.6,68.2 47.6,65.741 46.975,65.116 D.4@46.975,63.7 46.975,63.25 46.5,62.775 C33.2@46.5,61.625 46.5,61.575 47.775,60.3 48.25,60.3 R32.1@48.575,59.975 ; R26.2@38.775,58.775 40.849,58.775 41.025,58.599 41.025,54.375 ; R27.2@38.825,54.375 40.9,54.375 ; R33.2@38.85,49.9 40.375,49.9 40.9,50.425 40.9,54.25 41.025,54.25 41.469,54.25 41.592,54.373 42.012,54.373 v1(42.069,54.43) ; R30.1@39.15,61.95 39.2,61.95 41.15,60 41.6,60 ; v1@41.992,54.507 44.793,57.308 45.018,57.533 45.018,57.775 ; v1@42.069,54.3 42.142,54.373 42.474,54.373 42.562,54.285 43.263,54.285 43.299,54.25 53.65,54.25 55.9,52 56.225,52 58.475,54.25 58.922,54.25 59.702,55.03 59.702,57.25 59.552,57.4 v1@59.552,59.7 ; R29.1@42.975,60 41.6,60 ; v1(43.379,33.918) 43.379,33.929 44.475,35.025 R28.2@44.525,35.025 ; R28.2@44.55,35.05 R18.1@44.55,36.875 44.6,36.875 46.275,38.55 46.275,38.85 46.232,38.893 46.232,39.468 v1(46.175,39.525) ; v1(45.075,58.15) 45.075,57.775 44.7,57.4 42.726,57.4 41.725,58.401 41.725,59.875 41.6,60 ; v1@45.113,58.188 48.813,58.188 49.25,58.625 49.25,59.13 49.412,59.293 49.412,59.9 ; R32.1@48.575,59.9 49.412,59.9 ; R31.1@50.375,59.925 50.35,59.9 49.412,59.9 ; v1(53.158,32.241) 53.158,34.183 53.4,34.425 53.775,34.425 54.15,34.05 R20.2@54.15,34.025 ; v1@53.3,28.924 54.324,28.924 55.25,29.85 P.1@55.25,30.25 55.25,30.65 55.5,30.9 56.055,30.9 56.131,30.977 v1(56.213,30.977) ; v1@59.125,32.6 58.813,32.288 v1(58.813,31.202) 60.748,31.202 62.225,29.725 64.275,29.725 65.5,28.5 67.15,28.5 70.25,31.6 XP4_2.31@71.2,31.6 ; C28.2@59.575,62.7 59.625,62.65 59.625,59.854 59.61,59.839 v1@59.61,59.715 ; LDO1.3@61.95,63.3 61.95,66.864 62.475,67.389 v1(62.475,67.4) ; C2.2@69.6,76.775 69.68,76.855 71.92,76.855 v1(72.625,76.15)
  other v1: 53.366,28.905 71.205,31.615 75.105,31.615 59.138,32.552 72.908,55.691 59.558,59.641 32.105,72.445 36.005,72.445
3V3_SEN: C3.2 C4.2 C12.2 C13.2 C23.2 C25.2 C29.2 C31.2 C32.2 D1.1 D1.10 D2.3 D2.11 D3.B2 D3.E5 LDO2.3 R6.2 R7.2 R35.2 R38.2 R42.2 U2.5 U2.8 U3.2 U3.4 U3.13 | length 166.4
  Top Layer 1 w0.125: v1@53.825,72.125 53.562,72.388 53.562,74.988 53.687,75.113 55.362,75.113 56.1,74.375 D3.B2@56.575,74.375
  Top Layer 1 w0.3: D1.1@44.4,74.715 44.415,74.715 45.4,75.7 45.525,75.7 C12.2@45.875,76.05 45.875,75.025 ; D1.10@44.915,74.45 C13.2@46.075,74.45 ; R42.2@46,59.2 46,59.15 46.85,58.3 48.449,58.3 48.625,58.476 48.625,61.5 48.932,61.807 50.007,61.807 50.325,62.125 50.325,63.35 R38.2@49.075,64.6 ; C13.2@46.575,73.925 46.575,73.95 45.875,74.65 45.875,75.025 ; R38.2@48.95,64.675 49.3,65.025 51.419,65.025 51.744,65.35 v1(51.825,65.35) ; v1@51.875,67.125 52,67.25 C4.2@52,68.05 ; U2.5@53.35,68.05 53.25,68.05 C4.2@52,68.05 ; U2.8@53.5,69.7 53.5,69.8 53.425,69.875 C3.2@52,69.875 ; v1@53.8,71.975 52.2,73.575 49.722,73.575 48.272,75.025 45.875,75.025 ; v1@53.825,71.975 53.825,71.9 52,70.075 C3.2@52,69.875 ; D3.E5@57.424,73.526 57.424,73.293 v1(59.663,71.054) ; v1(58.492,45.868) 58.573,45.868 58.94,46.235 58.973,46.235 59.185,46.447 v1(59.185,51.075) ; D2.11@61.275,28 61.919,28 62.915,27.004 62.915,26.796 63.186,26.525 65.5,26.525 C25.2@65.6,26.425 65.6,28.5 C23.2@65.65,28.55 ; U3.13@62.875,65.85 62.875,65.674 62.9,65.649 62.9,65.551 v1@63.576,64.875 ; D2.3@63.605,29 63.63,28.975 64.024,28.975 64.312,28.687 64.312,28.588 64.6,28.3 C23.2@65.575,28.3 ; v1@63.75,64.701 64.551,63.9 64.649,63.9 64.674,63.875 U3.4@64.85,63.875 ; v1@63.75,64.875 U3.2@64.85,64.875 ; v1@68.075,65.05 R6.2@68.075,66.275 ; C4.2@52,68.05 C3.2@52,69.875
  Top Layer w0.3: v1(49.175,32.225) 49.175,30.525 53.625,26.075 63.325,26.075 63.725,26.475 v1@63.725,26.5 ; v1@51.725,67.025 51.819,66.931 51.819,65.356 v1(51.825,65.35) ; v1(59.663,71.054) 61.167,69.55 61.584,69.55 63.685,67.449 v1@63.685,64.835 ; 63.7,65.375 65.677,65.375 66.002,65.05 v1(68.06,65.05)
  Bottom Layer 1 w0.3: R35.2@38.85,45.425 38.85,45.475 39.675,46.3 40.171,46.3 40.646,46.775 57.649,46.775 57.825,46.599 57.825,45.676 58.001,45.5 58.385,45.5 54.594,41.709 54.053,41.709 50.321,37.977 50.321,35.662 48.95,34.291 48.95,33.411 49.175,33.186 v1(49.175,32.225) ; v1(53.85,71.925) C32.2@55.225,71.925 ; C32.2@55.425,72.125 C32.2@55.225,71.925 ; 58.41,45.5 59.1,45.5 C31.2@59.4,45.8 ; 58.492,45.5 v1(58.492,45.868) ; v1@59.125,51.075 59.125,52.418 60.152,53.445 60.152,61.037 60.675,61.56 62.579,61.56 63.685,62.666 v1(63.685,64.825) ; v1(59.663,71.054) 59.631,71.087 59.251,71.087 59.075,71.262 59.075,72.175 57.9,71 55.351,71 55.175,71.176 55.175,71.875 C32.2@55.225,71.925 ; LDO2.3@61.632,45.8 61.977,46.145 LDO2.3@61.977,46.428
  other v1: 63.738,26.452 51.813,67.052
4V2: 
5V: C27.2 C30.2 CAN1.3 LDO1.1 LDO2.1 VD1.2 XP1_1.7 XP1_1.8 XP1_2.7 XP1_2.8 XP4_1.33 XP4_1.34 XP4_2.33 XP4_2.34 | length 57.1
  Top Layer 1 w0.6: v1(34.258,64.691) 34.258,26.941 35.364,25.835 38.124,25.835 38.475,26.186 38.475,28.7 v1@38.575,28.8 ; v1@38.575,28.775 38.969,28.775 39.504,28.24 CAN1.3@40.161,28.24
  Bottom Layer 1 w0.6: v1@34.25,64.725 33.975,65 33.975,71.84 35.825,73.69 v1(36.05,73.69)
  other v1: 38.56,28.775 71.205,30.345 75.105,30.345 32.105,73.715
GND: C1.1 C2.1 C3.1 C4.1 C5.1 C7.1 C8.1 C9.1 C10.1 C11.1 C12.1 C13.1 C14.1 C15.1 C16.1 C17.1 C18.1 C19.1 C20.1 C21.1 C22.1 C23.1 C24.1 C25.1 C26.1 C27.1 C28.1 C29.1 C30.1 C31.1 C32.1 C33.1 C34.1 C35.1 CAN1.2 D1.3 D1.8 D1.9 D2.2 D2.4 D2.6 D2.7 D3.A1 D3.C5 D3.E1 D3.E3 D4.6 D4.7 D.6 D.S1 D.S2 HL3.2 HL4.2 LDO1.2 LDO2.2 P.6 R14.1 R17.2 R25.2 R34.1 R36.2 R37.2 U1.4 U2.6 U2.7 U3.9 U3.11 U4.16 U4.38 U4.51 U4.61 U4.83 U4.94 U4.107 U4.120 U4.130 XP1_1.37 XP1_1.38 XP1_1.39 XP1_1.40 XP1_2.37 XP1_2.38 XP1_2.39 XP1_2.40 XP2_1.1 XP2_1.2 XP2_1.3 XP2_1.4 XP2_1.5 XP2_1.6 XP2_1.37 XP2_1.38 XP2_1.39 XP2_1.40 XP2_2.1 XP2_2.2 XP2_2.3 XP2_2.4 XP2_2.5 XP2_2.6 XP2_2.37 XP2_2.38 XP2_2.39 XP2_2.40 XP3_1.1 XP3_1.2 XP3_1.3 XP3_1.4 XP3_1.35 XP3_1.36 XP3_1.37 XP3_1.38 XP3_1.39 XP3_1.40 XP3_2.1 XP3_2.2 XP3_2.3 XP3_2.4 XP3_2.35 XP3_2.36 XP3_2.37 XP3_2.38 XP3_2.39 XP3_2.40 XP4_1.1 XP4_1.2 XP4_1.3 XP4_1.4 XP4_2.1 XP4_2.2 XP4_2.3 XP4_2.4
  other v1: 50.391,26.393 32.105,26.535 36.005,26.585 32.105,27.805 36.005,27.805 32.105,29.075 36.005,29.075 57.2,32.891 50.7,34.3 60.271,36.816 54.491,38.393 48.291,39.193 41,42.3 71.205,49.325 32.105,49.395 36.005,49.395 75.105,49.395 32.105,50.665 36.005,50.665 75.105,50.665 71.209,50.713 40.3,50.9 32.105,53.395 36.005,53.395 71.205,53.395 75.105,53.395 32.105,54.665 36.005,54.665 71.205,54.665 75.105,54.665 54.7,58.3 60.752,58.5 42.6,59 49.489,62.407 44.475,63.4 59.76,64.9 52.891,68.993 52.391,71.693 71.205,74.985 75.105,74.985 71.205,76.255 75.105,76.255 75.105,77.525 71.205,77.542
NetC1_2: C1.2 CAN1.5 R1.2 R2.2 | length 9.7
  Top Layer 1 w0.15: CAN1.5@45.089,26.97 47.17,26.97 R2.2@47.45,27.25 R1.2@49.4,27.25 49.2,27.05 49.2,25.788 49.288,25.7 51.312,25.7 51.4,25.788 C1.2@51.4,27.2
NetC5_2: C5.2 U3.10 | length 1.3
  Top Layer 1 w0.15: C5.2@61.1,64.45 62.275,64.45 62.35,64.375 U3.10@62.4,64.375
NetC6_1: C6.1 U3.12 | length 6.6
  Top Layer 1 w0.15: U3.12@62.4,65.375 60.657,65.375 60.325,65.043 60.325,63.857 60.966,63.216 61.659,63.216 62.725,62.15 C6.1@62.775,62.15
NetC6_2: C6.2 U3.8 | length 2.2
  Top Layer 1 w0.15: U3.8@62.875,63.4 62.95,63.325 62.95,63.157 63.232,62.875 63.7,62.875 64.425,62.15 C6.2@64.475,62.15
NetC7_2: C7.2 U4.24 Y1.2 | length 7
  Top Layer 1 w0.15: v1@43.875,43.45 U4.24@44.98,43.45
  Bottom Layer 1 w0.15: C7.2@42.6,40.8 C7.2@42.65,40.8 ; v1(43.716,43.243) 43.716,41.916 43.075,41.275 43.075,41.225 C7.2@42.65,40.8 ; Y1.2@45.575,40.925 45.45,40.8 C7.2@42.65,40.8
NetC8_2: C8.2 U4.23 Y1.1 | length 5.9
  Top Layer 1 w0.15: v1@43.525,44.275 43.85,43.95 U4.23@44.98,43.95
  Bottom Layer 1 w0.15: C8.2@42.575,45.2 C8.2@42.625,45.2 ; v1(43.591,44.293) 43.532,44.293 C8.2@42.625,45.2 ; Y1.1@45.575,45.225 45.55,45.2 C8.2@42.625,45.2
NetC26_2: C26.2 R18.2 U4.32 | length 12
  Top Layer 1 w0.15: v1(43.368,37.8) 43.282,37.886 43.282,38.145 43.206,38.221 43.206,38.269 43.1,38.375 41.957,38.375 41.675,38.657 41.675,39.943 41.807,40.075 42.993,40.075 43.125,39.943 43.125,39.632 43.433,39.324 43.867,39.324 43.993,39.45 U4.32@44.98,39.45
  Bottom Layer 1 w0.15: C26.2@40.75,36.9 40.813,36.963 41.825,36.963 ; R18.2@42.85,36.875 41.913,36.875 41.825,36.963 ; v1(43.368,37.8) 43.337,37.831 41.913,37.831 41.825,37.743 41.825,36.963
NetC34_2: C34.2 D4.5 R42.1 | length 4.6
  Top Layer 1 w0.15: C34.2@42.7,60.975 42.7,61.025 43.125,61.45 43.885,62.21 D4.5@43.885,62.477 ; 43.944,62.182 44.1,62.025 44.269,62.025 44.919,61.375 45.575,61.375 46,60.95 R42.1@46,60.9
NetC35_2: C35.2 D4.8 | length 1.8
  Top Layer 1 w0.15: D4.8@45.537,62.65 46.125,62.65 46.325,62.85 C35.2@47.275,62.85
NetCAN1_1: CAN1.1 U4.74 | length 40.7
  Top Layer 1 w0.15: CAN1.1@40.161,30.78 42.005,30.78 v1@42.375,31.15 ; v1@65,40.425 65,38.597 65.512,38.085 65.59,38.085 65.725,37.95 U4.74@66.32,37.95
  Bottom Layer 1 w0.15: v1(42.441,31.168) 44.064,31.168 46.507,28.725 49.866,28.725 50.211,28.38 54.898,28.38 56.75,30.232 56.75,31.65 57.725,32.625 57.725,38.568 61.78,42.623 62.886,42.623 v1(65.066,40.443)
NetCAN1_4: CAN1.4 U4.73 | length 42.7
  Top Layer 1 w0.15: CAN1.4@40.161,26.97 40.885,26.97 v1@41.675,26.18 ; v1@64.45,39 64.45,38.647 65.512,37.585 65.59,37.585 65.725,37.45 U4.73@66.32,37.45
  Bottom Layer 1 w0.15: v1(41.741,26.068) 41.741,28.009 42.942,29.21 45.344,29.21 46.905,27.65 54.592,27.65 57.535,30.593 57.535,32.011 58.025,32.501 58.025,34.35 58.775,35.1 58.775,38.819 62.278,42.323 62.402,42.323 64.516,40.209 v1(64.516,39.018)
NetCAN1_6: CAN1.6 R2.1 XP2_1.26 XP2_2.26 | length 57.6
  Top Layer 1 w0.15: CAN1.6@45.089,28.24 46.79,28.24 ; R2.1@47.45,28.95 47.45,28.9 46.79,28.24 ; v1(48.45,28.2) 48.41,28.24 46.79,28.24 ; v1(61.112,43.473) 61.172,43.532 61.172,43.998 63.641,46.466 63.641,48.395 64.427,49.181 64.427,49.27 64.65,49.493 v1@64.65,50.85
  Bottom Layer w0.15: v1(48.45,28.2) 49.875,29.625 49.875,37.849 54.593,42.568 58.108,42.568 59.216,43.675 60.875,43.675 v1@61.075,43.475 ; v1(64.71,50.85) 71.73,57.87 71.73,61.647 74.162,64.08 75.322,64.08 75.63,63.772 75.63,62.81 75.22,62.4 v1@75.05,62.4
  other v1: 75.105,62.285
NetCAN1_7: CAN1.7 R1.1 XP2_1.24 XP2_2.24 | length 53.2
  Top Layer 1 w0.15: CAN1.7@45.089,29.51 46.642,29.51 46.857,29.725 48.675,29.725 ; R1.1@49.4,28.95 49.4,29 48.675,29.725 ; v1(51.275,32.275) 51.225,32.275 48.675,29.725 ; v1@59.9,43.15 61.987,45.237 61.987,47.484 v1(63.924,49.421)
  Bottom Layer w0.15: v1@51.225,32.35 51.2,32.35 50.175,33.375 50.175,37.725 52.955,40.505 57.315,40.505 v1(59.96,43.15) ; v1(63.924,49.421) 64.046,49.421 64.309,49.684 64.509,49.684 72.75,57.925 72.75,61.183 75.105,63.537 v1(75.105,63.555)
NetD1_2: D1.2 R8.2 | length 2.5
  Top Layer 1 w0.15: R8.2@41.875,75.825 42.3,75.4 43.2,75.4 43.885,74.715 D1.2@43.9,74.715
NetD1_4: D1.4 R9.2 | length 1.5
  Top Layer 1 w0.15: R9.2@41.875,73.95 D1.4@43.385,73.95
NetD1_5: D1.5 R10.2 | length 2.1
  Top Layer 1 w0.15: R10.2@41.875,72.075 42.3,72.5 42.42,72.5 43.37,73.45 D1.5@43.385,73.45
NetD1_6: D1.6 U4.49 | length 53.5
  Top Layer 1 w0.15: v1(43.866,72.368) 43.883,72.385 43.883,73.168 D1.6@43.9,73.185 ; v1(46.145,57.122) 46.535,56.732 46.535,56.062 47.472,55.125 47.824,55.125 51.149,51.8 52.812,51.8 52.928,51.684 52.928,43.951 52.9,43.923 U4.49@52.9,35.53
  Bottom Layer 1 w0.15: v1@43.8,72.35 43.95,72.2 43.95,71.2 44.325,70.825 51.012,70.825 51.175,70.662 51.175,58.745 51.1,58.67 51.1,57.424 50.743,57.068 46.2,57.068 v1(46.145,57.122)
NetD1_7: D1.7 U4.125 | length 22.5
  Top Layer 1 w0.15: D1.7@44.4,73.185 44.415,73.185 45.7,71.9 45.7,71.692 47.625,69.767 47.625,69.357 50.516,66.466 52.484,66.466 55.375,63.574 v1(55.375,61.85) ; U4.125@56.4,56.87 56.4,58.625 56.423,58.625 v1(56.441,58.643)
  Bottom Layer 1 w0.15: v1(55.375,61.85) 56.441,60.784 v1(56.441,58.643) 56.441,58.634 v1@56.45,58.625
NetD2_1: D2.1 U4.92 | length 35.7
  Top Layer 1 w0.15: D2.1@63.605,30 64.243,30 64.693,29.55 v1@65.5,29.55 ; v1@64.482,48.051 65.518,47.015 66.255,47.015 U4.92@66.32,46.95
  Top Layer w0.15: v1(64.441,48.093) 68.19,48.093 68.822,48.725 72.308,48.725 73.45,47.583 73.45,44.223 71.527,42.3 70.987,42.3 68.05,39.362 68.05,32.04 v1(65.56,29.55)
NetD2_5: D2.5 U4.50 | length 19.1
  Top Layer 1 w0.15: U4.50@53.4,35.53 53.4,34.57 53.576,34.394 53.824,34.394 54.025,34.193 54.025,33.157 55.7,31.482 55.7,27.461 v1(55.639,27.4) ; v1(62.891,28.068) 62.925,28.034 63.571,28.034 D2.5@63.605,28
  Bottom Layer 1 w0.15: v1(55.639,27.4) 55.7,27.461 55.7,28.118 57.182,29.6 61.275,29.6 v1@62.825,28.05
NetD2_8: D2.8 R11.2 | length 4.1
  Top Layer 1 w0.15: R11.2@58.45,26.4 62.34,26.4 62.44,26.5 D2.8@62.44,26.585
NetD2_9: D2.9 R13.2 | length 3.5
  Top Layer 1 w0.15: R13.2@58.45,28.225 59.225,28.225 59.4,28.05 59.4,27.845 60.245,27 D2.9@61.275,27
NetD2_10: D2.10 D2.15 R12.1 | length 5.8
  Top Layer 1 w0.15: R12.1@58.45,30.075 58.525,30 60.7,30 ; D2.10@61.275,27.5 61.175,27.6 60.887,27.6 60.755,27.732 60.755,29.945 60.7,30 ; D2.15@61.275,30 60.7,30
NetD2_12: D2.12 U4.91 | length 30.9
  Top Layer 1 w0.15: D2.12@61.275,28.5 62.1,28.5 v1@62.725,29.125 ; v1(64.914,46.743) 65.036,46.743 65.328,46.45 U4.91@66.32,46.45
  Top Layer w0.15: v1(62.785,29.125) 62.785,36.435 71.8,45.45 71.8,45.732 71.282,46.25 65.509,46.25 65.016,46.743 v1(64.914,46.743)
NetD2_13: D2.13 U4.90 | length 34.5
  Top Layer 1 w0.15: D2.13@61.275,29 61.817,29 63.317,30.5 v1@64.425,30.5 ; v1@64.1,46.675 64.183,46.675 64.908,45.95 U4.90@66.32,45.95
  Top Layer w0.15: v1@64.175,46.775 64.252,46.852 64.252,47.121 64.398,47.268 64.782,47.268 64.815,47.3 71.502,47.3 72.463,46.339 72.463,45.238 64.485,37.26 v1(64.485,30.5)
  other v1: 64.166,46.693
NetD2_14: D2.14 U4.53 | length 11.3
  Top Layer 1 w0.15: U4.53@54.9,35.53 54.9,34.935 55.035,34.8 55.035,34.722 55.287,34.47 57.373,34.47 57.775,34.068 57.775,33.032 59.337,31.47 60.593,31.47 61.875,30.188 61.875,29.736 61.739,29.6 61.375,29.6 D2.14@61.275,29.5
NetD2_16: D2.16 U4.93 | length 38
  Top Layer 1 w0.15: D2.16@62.44,30.415 62.44,30.535 62.54,30.635 62.66,30.635 65,32.975 67.237,32.975 67.325,33.063 67.325,34.068 66.118,35.275 v1@65.95,35.275 ; v1(64.952,49.053) 64.975,49.03 64.975,48.122 65.582,47.515 66.255,47.515 U4.93@66.32,47.45
  Top Layer w0.15: v1@65,49.075 64.974,49.075 v1(64.952,49.053) 64.537,48.638 64.244,48.638 63.825,48.219 63.825,47.775 64.032,47.568 64.658,47.568 64.69,47.6 71.417,47.6 71.518,47.7 72.575,47.7 73.05,47.225 73.05,45.307 65.988,38.245 v1(65.988,35.202)
NetD3_A3: D3.A3 R22.2 | length 2.3
  Top Layer 1 w0.15: v1(56.4,75.775) 56.4,75.116 D3.A3@56.858,74.658
  Bottom Layer 1 w0.15: R22.2@55.4,75.775 v1(56.4,75.775)
NetD3_A5: D3.A5 U4.55 | length 42.2
  Top Layer 1 w0.125: D3.A5@57.425,74.675 57.725,74.675 58.225,74.175 v1@58.225,73.725
  Top Layer 1 w0.15: U4.55@55.9,35.53 55.9,53.253 56.674,54.027 56.674,54.44 v1(56.76,54.527)
  Bottom Layer w0.15: v1(54.824,66.701) 54.901,66.701 56.438,68.238 56.438,71.977 v1(58.113,73.652)
  Bottom Layer 1 w0.15: v1(54.824,66.701) 54.824,61.369 55.768,60.425 55.768,55.468 56.709,54.527 v1(56.76,54.527)
NetD3_B4: D3.B4 R23.2 | length 3.6
  Top Layer 1 w0.125: D3.B4@57.15,74.375 v1@57.15,76.8
  Bottom Layer 1 w0.15: v1(57.155,76.774) 57.155,76.195 R23.2@57.55,75.8
NetD3_C1: D3.C1 R24.1 | length 2.1
  Top Layer 1 w0.15: R24.1@54.325,74.4 54.633,74.092 D3.C1@56.292,74.092
NetD3_D2: D3.D2 U4.89 | length 34.6
  Top Layer 1 w0.15: D3.D2@56.583,73.792 56.583,72.133 57.178,71.538 58.555,71.538 59.15,70.943 59.15,70.825 v1@61.025,68.95 ; v1(64.661,45.468) 64.679,45.45 U4.89@66.32,45.45
  Top Layer w0.15: v1(61.085,68.95) 61.085,67.618 61.435,67.268 61.435,58.193 61.241,57.998 61.241,52.108 61.175,52.042 61.175,48.858 62.827,47.206 62.827,46.865 63.824,45.868 64.261,45.868 v1(64.661,45.468)
NetD4_1: D4.1 R41.2 | length 2.7
  Top Layer 1 w0.15: R41.2@41.025,62.85 41.075,62.85 42.375,64.15 D4.1@43.212,64.15
NetD4_4: D4.4 U4.88 | length 42.7
  Top Layer 1 w0.15: v1@42.775,56.8 41.975,57.6 41.975,61.618 42.466,62.109 42.559,62.109 43.1,62.65 D4.4@43.212,62.65 ; v1(44.2,59) 44.2,58.323 44.091,58.214 44.091,57.658 48.196,53.553 48.397,53.553 50.35,51.6 50.35,48.617 51.075,47.892 51.075,47.249 50.616,46.79 v1(50.616,46.025) ; v1(63.611,45.343) 63.733,45.343 63.993,45.082 64.199,45.082 64.339,44.943 64.983,44.943 64.991,44.95 U4.88@66.32,44.95
  Top Layer w0.15: v1(42.788,56.727) 44.2,58.139 v1(44.2,59)
  Bottom Layer w0.15: v1(50.616,46.025) 50.702,46.111 51.076,46.111 51.783,46.818 56.799,46.818 58.274,45.343 v1(63.611,45.343)
NetD4_9: D4.9 U4.132 | length 28.1
  Top Layer 1 w0.15: D4.9@45.537,63.15 45.65,63.15 45.7,63.2 45.7,63.212 45.788,63.3 45.868,63.3 46.22,63.651 v1(46.22,65.005) ; U4.132@52.9,56.87 52.965,56.805 52.965,55.996 53.339,55.622 53.339,54.961 v1@53.35,54.95
  Bottom Layer w0.15: v1(46.22,65.005) 48.475,62.75 48.475,60.3 48.575,60.2 49.812,60.2 50.094,60.481 50.094,63.394 51.45,64.75 v1@52.75,64.75
  Bottom Layer 1 w0.15: v1(52.763,64.827) 52.763,62.415 53.416,61.762 53.416,54.991 v1@53.375,54.95
  other v1: 53.416,54.968
NetD4_12: D4.12 R38.1 U4.22 | length 31.1
  Top Layer 1 w0.15: D4.12@44.875,64.313 44.875,64.425 45.5,65.05 45.593,65.05 45.725,65.182 45.725,65.253 46.002,65.53 46.437,65.53 46.775,65.192 46.775,65.1 47.2,64.675 R38.1@47.25,64.675 ; U4.22@44.98,44.45 47.034,44.45 47.409,44.075 48.804,44.075 49.375,44.646 49.375,47.117 49.016,47.476 v1(49.016,47.5) ; R38.1@47.288,64.712 47.725,64.275 47.725,63.768 48.2,63.293 48.2,62.183 48.216,62.167 48.216,59.706 v1(47.41,58.9)
  Top Layer w0.15: v1@47.4,58.825 46.85,58.275 46.85,52.599 47.001,52.448 47.001,49.145 46.875,49.019 46.875,48.158 47.533,47.5 v1(49.016,47.5)
NetD4_13: D4.13 R39.2 | length 1.7
  Top Layer 1 w0.15: D4.13@44.375,64.313 44.425,64.363 44.425,64.543 44.728,64.847 44.747,64.847 44.95,65.05 R39.2@44.95,65.775
NetD4_14: D4.14 R40.2 | length 3.1
  Top Layer 1 w0.15: R40.2@41.025,64.7 41.225,64.5 43.543,64.5 43.568,64.475 43.825,64.475 43.875,64.425 D4.14@43.875,64.313
NetD_1: D.1 R31.2 U4.101 | length 62.9
  Top Layer 1 w0.15: U4.101@66.32,51.45 69.677,51.45 69.765,51.538 72.463,51.538 v1(72.838,51.913)
  Top Layer w0.15: v1@72.725,70.95 73.825,69.85 73.825,53.996 73.091,53.261 73.091,52.288 72.838,52.034 v1(72.838,51.913)
  Bottom Layer w0.15: v1@49.05,69.475 49.098,69.427 51.848,69.427 52.3,68.975 52.3,67.65 53.9,66.05 55.15,66.05 59.53,70.43 71.202,70.43 71.674,70.902 v1(72.738,70.902)
  Bottom Layer 1 w0.15: v1@49.025,69.45 50.275,68.2 D.1@50.275,63.7 50.375,63.6 R31.2@50.375,61.625
  other v1: 49.038,69.427
NetD_2: D.2 R32.2 | length 2.4
  Bottom Layer 1 w0.15: R32.2@48.475,61.6 48.475,62.55 49.175,63.25 D.2@49.175,63.7
NetD_3: D.3 U4.42 | length 34.5
  Top Layer 1 w0.15: v1(47.525,61.449) 47.525,60.675 46.975,60.125 45.407,60.125 45.257,60.275 44.179,60.275 43.55,59.646 43.55,57.553 49.675,51.428 49.675,44.522 49.575,44.422 49.575,37.99 49.4,37.815 U4.42@49.4,35.53
  Bottom Layer 1 w0.15: v1(47.525,61.449) 47.525,62.018 47.8,62.293 47.8,63.425 D.3@48.075,63.7
NetD_5: D.5 U4.48 | length 32.5
  Top Layer 1 w0.15: v1(44.772,59.53) 44.772,58.626 44.55,58.405 44.55,57.623 48.32,53.853 48.63,53.853 52.628,49.854 52.628,46.564 52.491,46.427 52.491,43.136 52.4,43.046 U4.48@52.4,35.53
  Bottom Layer 1 w0.15: v1(44.772,59.53) 44.772,60.393 44.616,60.549 44.616,61.291 45.875,62.55 D.5@45.875,63.7
NetD_7: D.7 R29.2 U4.98 | length 94.1
  Top Layer 1 w0.15: v1(44.65,68.15) 44.573,68.227 40.302,68.227 39.676,67.6 38.888,67.6 38.8,67.688 38.8,76.75 39.162,77.112 45.562,77.112 46.517,78.067 71.731,78.067 72.072,77.727 v1(72.938,77.727) ; U4.98@66.32,49.95 67.28,49.95 67.375,50.045 67.375,50.318 67.507,50.45 68.973,50.45 69.555,49.868 72.641,49.868 72.95,49.558 v1@72.95,49.475
  Top Layer w0.15: v1@73,77.7 74.483,76.217 74.483,50.96 v1(73.016,49.493)
  Bottom Layer 1 w0.15: R29.2@42.975,61.7 42.975,62.55 43.675,63.25 D.7@43.675,63.7 43.675,65.775 44.65,66.75 v1(44.65,68.15)